# EAGLE board Aux Power Board V2 (EAGLE 9.2.2)
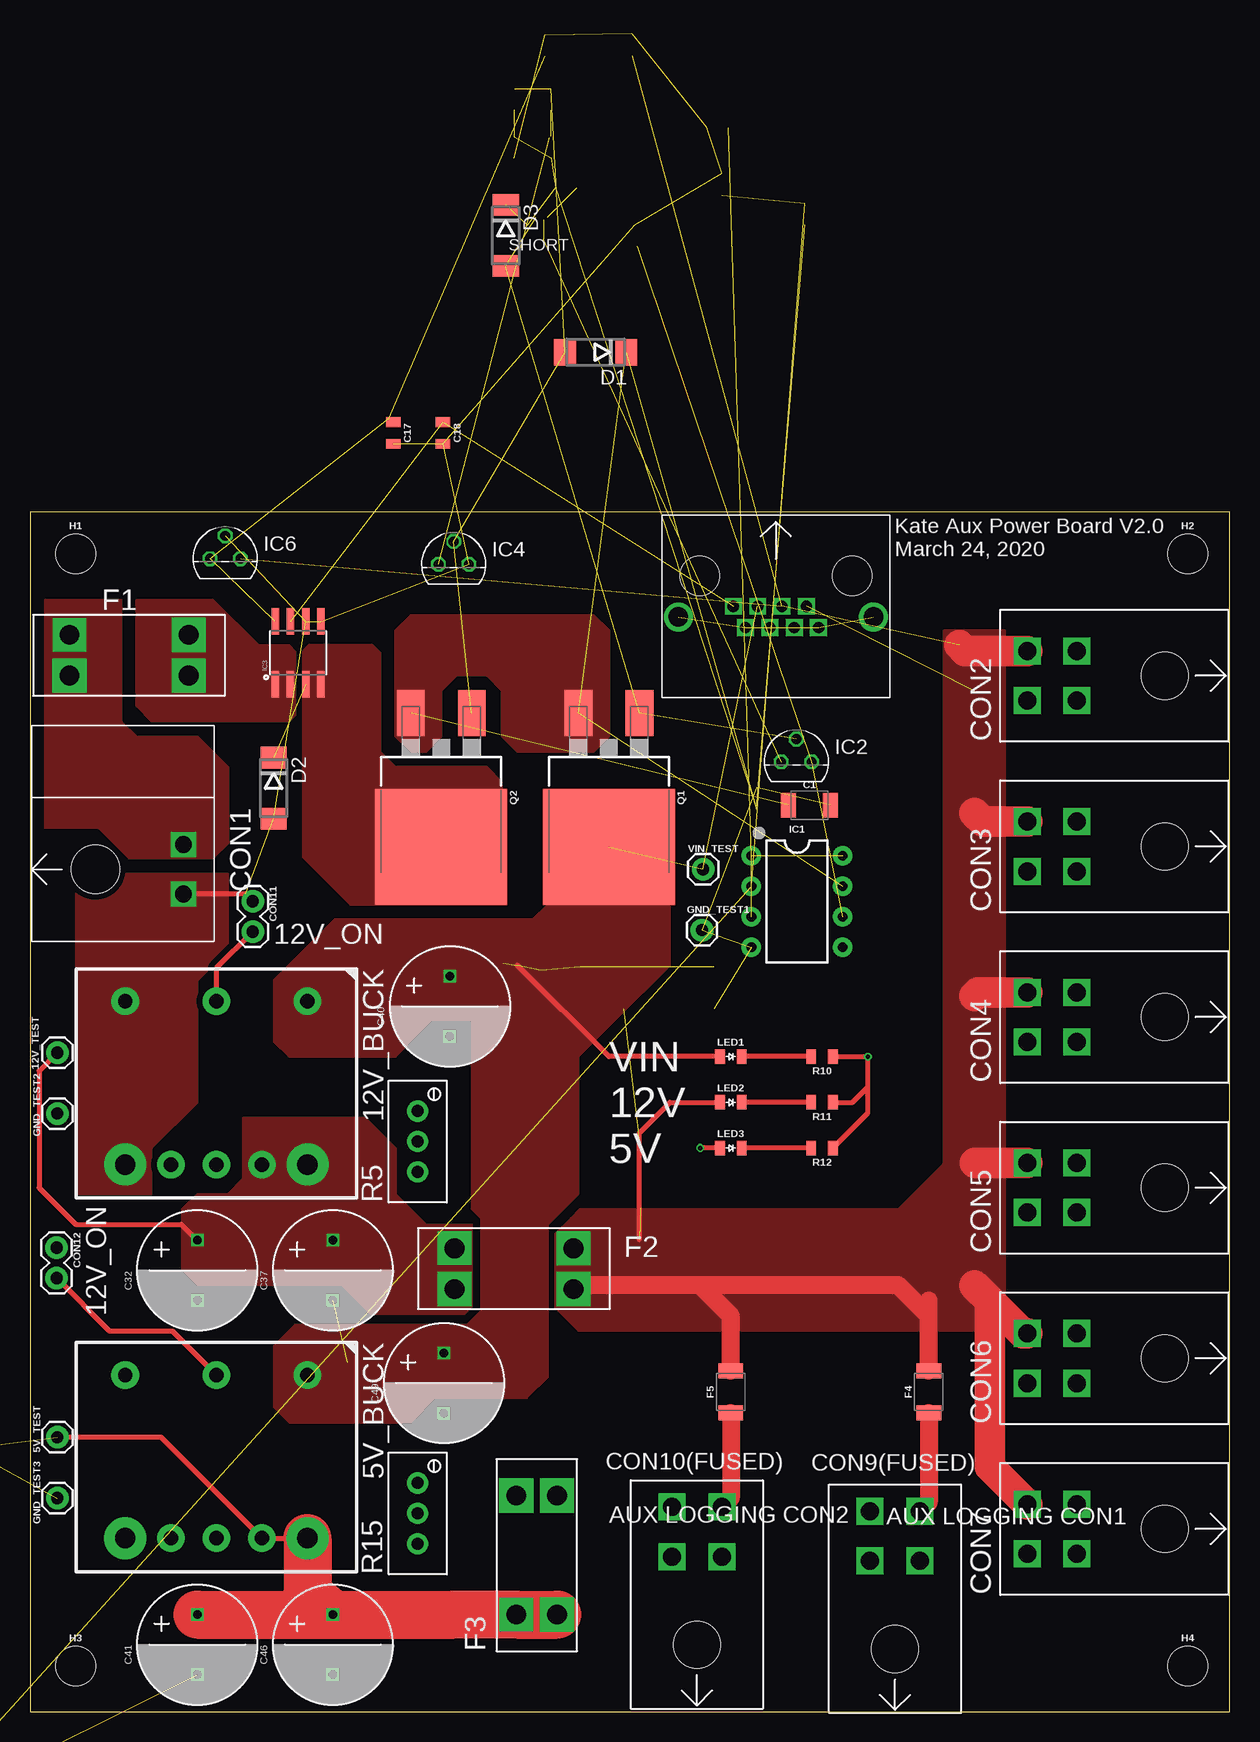
[diagram p0: board, top side]
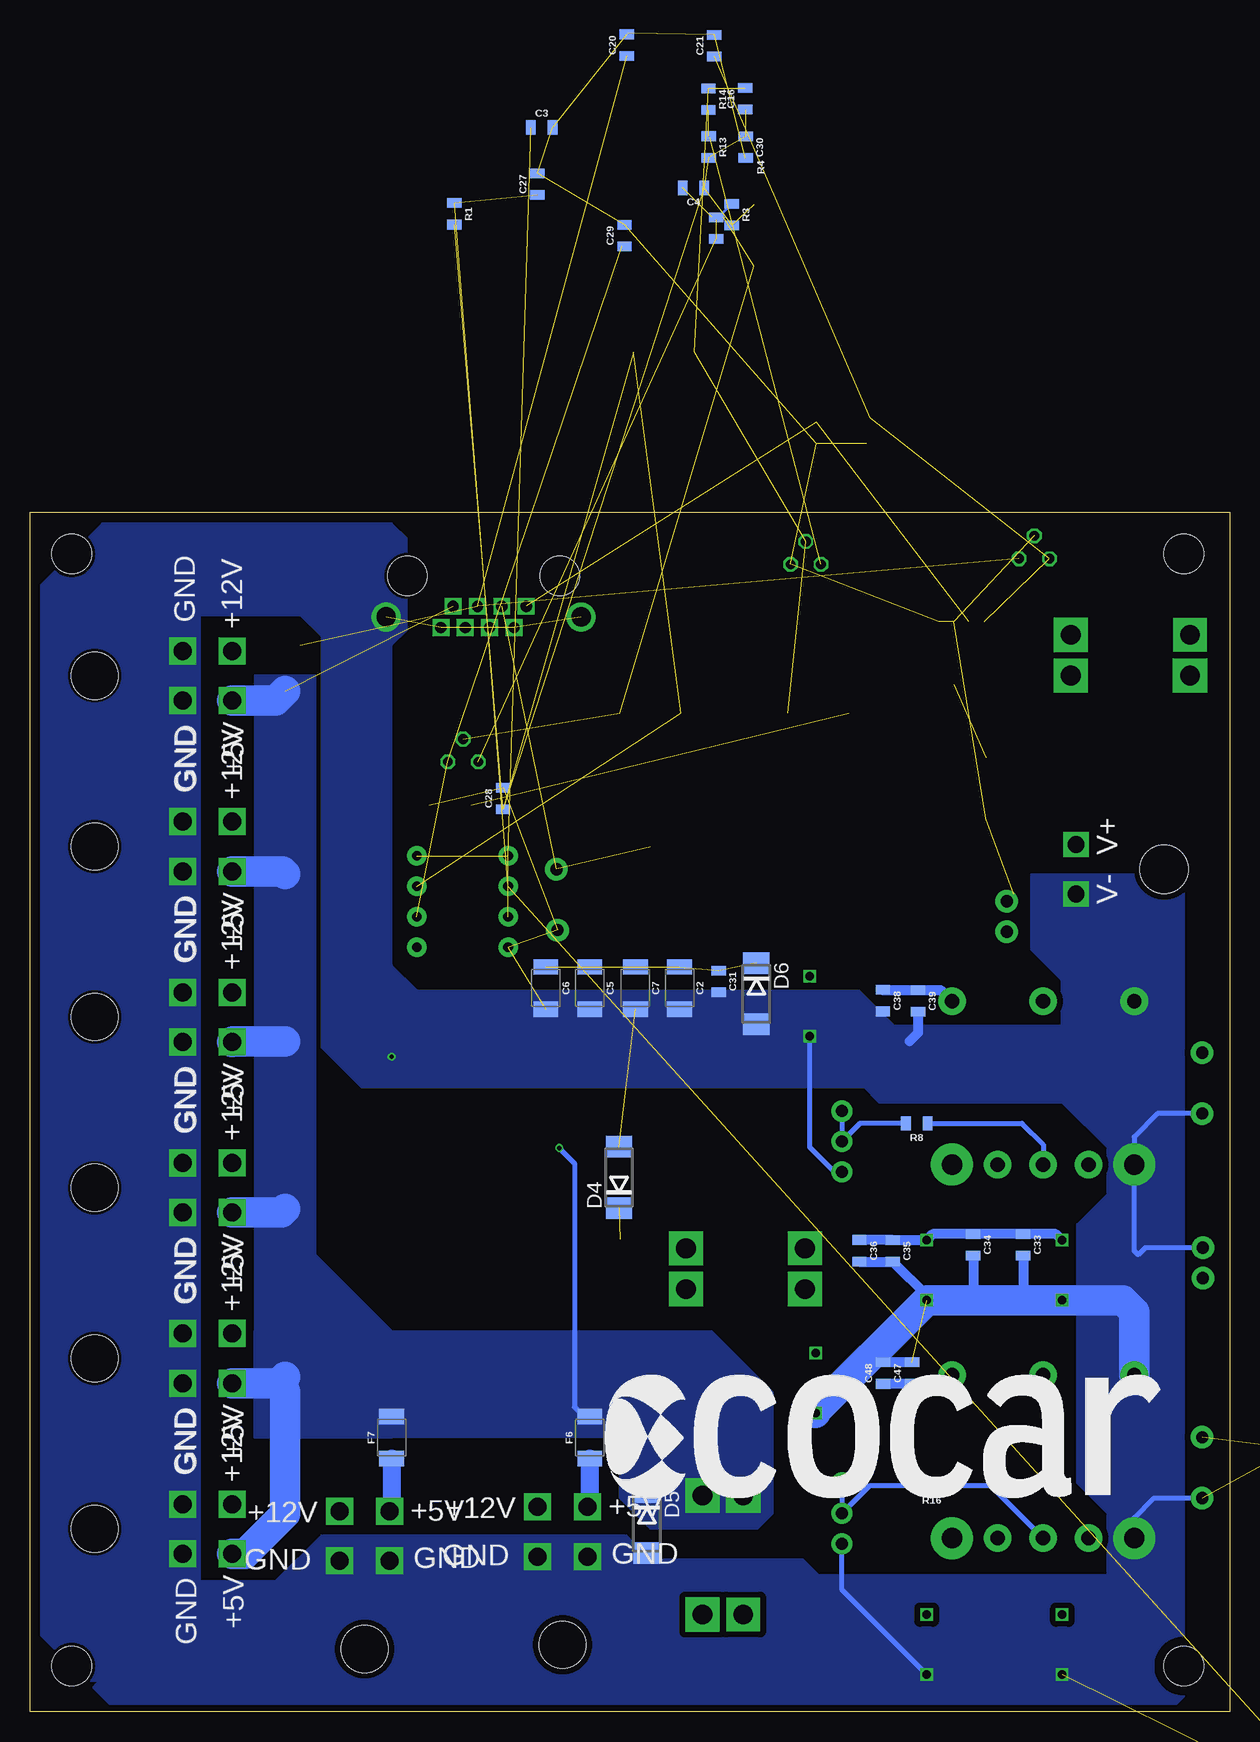
[diagram p1: board, bottom side, seen from below]

Size 100 x 100 mm. Coordinates in mm from the lower left corner, seen from the top.
Outline: 0,0 100,0 100,100 0,100 0,0
Copper layers (1*16): Top 0.035mm / dielectric 1.5mm / Bottom 0.035mm
Design rules "JLCPCB2Layer": minimum track width 6mil, minimum drill 10mil, track to track 6mil, track to pad 6mil, pad to pad 6mil, via to via 6mil, smd to smd 0mil, copper to edge 10mil, drill to drill 10mil, minimum pad ring 6mil, minimum via ring 6mil, stop-mask expansion 2mil, vias tented up to drill 100mil, thermal gap 10mil

## Footprints (pad centres in the part's own frame; a part is rotated, then mirrored left to right if it is on the bottom)
CONVERTER_I3A = drill 1.2 pad 2.3: 1 2.7,19.3; 2 2.7,11.7; 3 2.7,4.1; 5 16.3,7.9; 6 16.3,11.7; 7 16.3,15.5 | drill 1.7 pad 3.5: 4 16.3,4.1; 8 16.3,19.3
1X01 = drill 1.016 pad 1.88: 1 0,0
RJ45 = drill 0.94 square: 1 9.9,2.54; 2 8.88,4.32; 3 7.87,2.54; 4 6.85,4.32; 5 5.84,2.54; 6 4.82,4.32; 7 3.81,2.54; 8 2.79,4.32 | drill 1.62: 9 -1.78,3.43; 10 14.48,3.43 | hole 3.3: 0,0; 12.7,0
1210 = smd 1.27 x 2.06: 1 -1.755,0; 2 1.755,0
0805 = smd 0.8 x 1.2: 1 -0.9,0; 2 0.9,0
CAPACITOR_220UF_63V = drill 0.7 square: + 2.5,0; - -2.5,0
TE_2-PIN = drill 1.4 square: 1 -2.07,12.67; 2 2.07,12.67 | hole 4: 0,5.33
TE_4-PIN = drill 1.5 square: 1 2.07,11.48; 2 -2.07,11.48; 3 2.07,7.34; 4 -2.07,7.34 | hole 3.91: 0,0
1X02 = drill 1.016 pad 1.88: 1 0,0; 2 2.54,0
DO214AA = smd 1.8 x 2.2: A 2.55,0; C -2.55,0
FUSEHOLDER_VERTICAL = drill 1.65 pad 2.85 square: 1 3.045,1.665; 3 12.965,1.665; 4 12.965,5.065 | drill 1.65 pad 2.8 square: 2 3.045,5.065
STAND-OFF = hole 3.302: 0,0
DIP08 = drill 0.813 pad 1.626: 1 -3.81,-3.81; 2 -1.27,-3.81; 3 1.27,-3.81; 4 3.81,-3.81; 5 3.81,3.81; 6 1.27,3.81; 7 -1.27,3.81; 8 -3.81,3.81
TO92 = drill 0.813 octagon: 1 1.27,0; 2 0,1.905; 3 -1.27,0
SOIC8 = smd 0.61 x 2.21: 1 -1.905,-2.616; 2 -0.635,-2.616; 3 0.635,-2.616; 4 1.905,-2.616; 5 1.905,2.616; 6 0.635,2.616; 7 -0.635,2.616; 8 -1.905,2.616
0805_LED = smd 0.8 x 1.2: 1 -0.9,0; 2 0.9,0
TO-263/D2PAK = smd 2.32 x 3.81: 1 -2.54,-7.045; 3 2.54,-7.045 | smd 11 x 9.65: 2 0,4.125
TRIMPOT = drill 1 pad 1.778: 1 5.08,0; 2 2.54,0; 3 0,0

## Placement (x,y rotation side)
5V_BUCK  i3A  [CONVERTER_I3A]  3.84,30.78 270 top
5V_TEST  1X01  [1X01]  2.28,22.89 90 top
12V_BUCK  i3A  [CONVERTER_I3A]  3.84,61.92 270 top
12V_TEST  1X01  [1X01]  2.28,54.95 90 top
AUX_LOGGING  RJ45  [RJ45]  68.53,94.69 180 top
C1  10uF  [1210]  64.98,75.57 0 top
C2  10uF  [1210]  45.85,60.33 270 bottom
C3  1uF  [0805]  57.34,132.05 0 bottom  (outside the outline)
C4  1uF  [0805]  44.7,127.04 180 bottom  (outside the outline)
C5  10uF  [1210]  53.32,60.32 270 bottom
C6  10uF  [1210]  57.01,60.32 270 bottom
C7  10uF  [1210]  49.53,60.33 270 bottom
C16  1uF  [0805]  40.36,134.45 90 bottom  (outside the outline)
C17  0.1uF  [0805]  30.28,106.6 270 top  (outside the outline)
C18  1nF  [0805]  34.43,106.6 270 top  (outside the outline)
C20  0.1uF  [0805]  50.24,138.93 90 bottom  (outside the outline)
C21  1uF  [0805]  42.95,138.89 90 bottom  (outside the outline)
C27  0.1uF  [0805]  57.7,127.34 90 bottom  (outside the outline)
C28  0.1uF  [0805]  60.56,76.14 90 bottom
C29  0.1uF  [0805]  50.44,123.05 90 bottom  (outside the outline)
C30  0.1uF  [0805]  40.35,130.41 270 bottom  (outside the outline)
C31  0.1uF  [0805]  42.6,60.89 270 bottom
C32  220uF  [CAPACITOR_220UF_63V]  13.95,36.8 90 top
C33  0.1uF  [0805]  17.2,38.93 270 bottom
C34  10uF  [0805]  21.37,38.93 270 bottom
C35  10uF  [0805]  28.08,38.42 270 bottom
C36  10uF  [0805]  30.85,38.44 270 bottom
C37  220uF  [CAPACITOR_220UF_63V]  25.25,36.8 90 top
C38  1nF/50V  [0805]  28.89,59.28 270 bottom
C39  1uF/50V  [0805]  25.96,59.25 270 bottom
C40  220uF  [CAPACITOR_220UF_63V]  35.01,58.8 90 top
C41  220uF  [CAPACITOR_220UF_63V]  13.95,5.6 90 top
C42  0.1uF  [0805]  -11.32,28.12 0 top  (outside the outline)
C43  10uF  [0805]  -12.03,21.77 0 top  (outside the outline)
C44  10uF  [0805]  -8.93,21.77 0 top  (outside the outline)
C45  10uF  [0805]  -5.83,21.77 0 top  (outside the outline)
C46  220uF  [CAPACITOR_220UF_63V]  25.25,5.6 90 top
C47  1nF/50V  [0805]  26.47,28.23 90 bottom
C48  1uF/50V  [0805]  28.88,28.23 90 bottom
C49  220uF  [CAPACITOR_220UF_63V]  34.51,27.4 90 top
CON1  TE_2-PIN  [TE_2-PIN]  0.13,70.23 270 top
CON2  TE_4-PIN  [TE_4-PIN]  94.61,86.36 90 top
CON3  TE_4-PIN  [TE_4-PIN]  94.61,72.14 90 top
CON4  TE_4-PIN  [TE_4-PIN]  94.61,57.91 90 top
CON5  TE_4-PIN  [TE_4-PIN]  94.61,43.69 90 top
CON6  TE_4-PIN  [TE_4-PIN]  94.61,29.46 90 top
CON7  TE_4-PIN  [TE_4-PIN]  94.61,15.24 90 top
CON9(FUSED)  TE_4-PIN  [TE_4-PIN]  72.11,5.23 0 top
CON10(FUSED)  TE_4-PIN  [TE_4-PIN]  55.6,5.59 0 top
CON11  1X02  [1X02]  18.57,67.56 270 top
CON12  1X02  [1X02]  2.22,38.69 270 top
D1  SMBJ12CA  [DO214AA]  47.15,113.33 180 top  (outside the outline)
D2  SMBJ22CA  [DO214AA]  20.32,77 270 top
D3  SMBJ12CA  [DO214AA]  39.66,123.06 270 top  (outside the outline)
D4  SMBJ12CA  [DO214AA]  50.89,44.54 90 bottom
D5  SMBJ5.0CA  [DO214AA]  48.57,15.78 270 bottom
D6  SMBJ22CA  [DO214AA]  39.45,59.85 270 bottom
F1  7.5A  [FUSEHOLDER_VERTICAL]  0.25,84.71 0 top
F2  7.5A  [FUSEHOLDER_VERTICAL]  32.35,33.57 0 top
F3  7.5A  [FUSEHOLDER_VERTICAL]  45.61,5.06 90 top
F4  [1210]  74.93,26.67 90 top
F5  [1210]  58.42,26.67 90 top
F6  [1210]  53.34,22.86 90 bottom
F7  [1210]  69.85,22.86 90 bottom
GND_TEST1  1X01  [1X01]  56.02,65.16 0 top
GND_TEST2  1X01  [1X01]  2.28,49.87 90 top
GND_TEST3  1X01  [1X01]  2.28,17.81 90 top
H1  STAND-OFF  [STAND-OFF]  3.81,96.52 0 top
H2  STAND-OFF  [STAND-OFF]  96.52,96.52 0 top
H3  STAND-OFF  [STAND-OFF]  3.81,3.81 0 top
H4  STAND-OFF  [STAND-OFF]  96.52,3.81 0 top
IC1  OP-AMP_LM10  [DIP08]  63.95,67.54 270 top
IC2  LINEAR-REGULATOR_LM337L  [TO92]  63.9,79.19 0 top
IC3  CURRENT-SENSOR_ACS723  [SOIC8]  22.35,88.27 0 top
IC4  LINEAR-REGULATOR_LM337L  [TO92]  35.32,95.65 0 top
IC6  LINEAR-REGULATOR_LP2950  [TO92]  16.27,96.12 0 top
LED1  RED  [0805_LED]  58.42,54.61 0 top
LED2  RED  [0805_LED]  58.42,50.8 0 top
LED3  RED  [0805_LED]  58.42,46.99 0 top
Q1  [TO-263/D2PAK]  48.26,76.2 180 top
Q2  [TO-263/D2PAK]  34.29,76.2 180 top
R1  100k  [0805]  64.62,124.86 270 bottom  (outside the outline)
R2  10k  [TRIMPOT]  -10.16,-6.35 0 top  (outside the outline)
R3  2.4k  [0805]  41.49,124.8 270 bottom  (outside the outline)
R4  330  [0805]  42.8,123.67 270 bottom  (outside the outline)
R5  10k  [TRIMPOT]  32.31,45 90 top
R8  1.6k  [0805]  26.08,49.05 180 bottom
R10  3.9k  [0805]  66.04,54.61 180 top
R11  2k  [0805]  66.04,50.8 180 top
R12  560  [0805]  66.04,46.99 180 top
R13  2.4k  [0805]  43.43,130.44 270 bottom  (outside the outline)
R14  330  [0805]  43.44,134.41 270 bottom  (outside the outline)
R15  10k  [TRIMPOT]  32.31,14 90 top
R16  8.2k  [0805]  24.82,18.82 180 bottom
U$7  ECOCAR_LOGO  [ECOCAR_LOGO_2018]  52.07,17.78 0 bottom
VIN_TEST  1X01  [1X01]  56.11,70.24 0 top

## Library data of the parts
5V_BUCK 12V_BUCK = EcoCar-Modules
5V_TEST 12V_TEST CON11 CON12 GND_TEST1-GND_TEST3 VIN_TEST = EcoCar-Connectors-2.54mm
AUX_LOGGING CON1-CON7 CON9(FUSED) CON10(FUSED) = EcoCar-Connectors
C1-C7 C16-C18 C20 C21 C27-C49 R1-R5 R8 R10-R16 = EcoCar-Passives
D1-D6 F1-F7 = EcoCar-Fuses-Protection
H1-H4 U$7 = EcoCar-Miscellaneous
IC1-IC4 IC6 = EcoCar-Integrated-Circuits
LED1-LED3 Q1 Q2 = EcoCar-Discrete-Semiconductors

## Nets
5V: AUX_LOGGING.7 CON2.2 CON3.2 CON4.2 CON5.2 CON6.2 CON7.2 D5.C F3.3 F3.4 F6.2 F7.2 LED3.1
5V_LINEAR: C17.1 C21.1 IC3.8 IC6.3
12V: AUX_LOGGING.5 C20.1 CON2.1 CON3.1 CON4.1 CON5.1 CON6.1 CON7.1 D4.C F2.3 F2.4 F4.2 F5.2 IC6.1 LED2.1
BATTERY_IN: CON1.1 F1.1 F1.2
CURRENT_SENSOR_IN: F1.3 F1.4 IC3.1 IC3.2
CURRENT_SENSOR_OUT: D2.C IC3.3 IC3.4 Q2.2
GND: 5V_BUCK.3 5V_BUCK.4 12V_BUCK.3 12V_BUCK.4 AUX_LOGGING.2 AUX_LOGGING.4 AUX_LOGGING.6 AUX_LOGGING.8 AUX_LOGGING.9 AUX_LOGGING.10 C1.2 C2.2 C3.2 C5.2 C6.2 C7.2 C17.2 C18.2 C20.2 C21.2 C27.2 C28.2 C29.2 C30.2 C31.2 C32.- C33.2 C34.2 C35.2 C36.2 C37.- C38.2 C39.2 C40.- C41.- C42.2 C43.2 C44.2 C45.2 C46.- C47.2 C48.2 C49.- CON1.2 CON2.3 CON2.4 CON3.3 CON3.4 CON4.3 CON4.4 CON5.3 CON5.4 CON6.3 CON6.4 CON7.3 CON7.4 CON9(FUSED).3 CON9(FUSED).4 CON10(FUSED).3 CON10(FUSED).4 CON11.1 CON12.1 D2.A D4.A D5.A D6.A GND_TEST1.1 GND_TEST2.1 GND_TEST3.1 IC1.4 IC3.5 IC3.6 IC4.1 IC6.2 R2.1 R5.3 R10.1 R11.1 R12.1 R15.3
HALL_CURRENT: AUX_LOGGING.1 C18.1 IC3.7
N$1: CON9(FUSED).2 F7.1
N$2: CON9(FUSED).1 F4.1
N$3: 12V_BUCK.6 R8.1
N$4: LED1.2 R10.2
N$5: C3.1 IC1.1 IC1.3 IC1.8
N$6: C27.1 IC1.2 R1.1 R2.2 R2.3
N$7: R5.1 R5.2 R8.2
N$8: C4.2 D3.A IC2.2 Q1.1 R4.1
N$9: IC2.3 R3.1 R4.2
N$10: CON10(FUSED).1 F5.1
N$11: 5V_BUCK.6 R16.1
N$12: CON10(FUSED).2 F6.1
N$13: LED3.2 R12.2
N$17: LED2.2 R11.2
N$18: IC4.3 R13.1 R14.2
N$21: C16.2 D1.A IC4.2 Q2.1 R14.1
N$25: 12V_BUCK.7 12V_BUCK.8 12V_TEST.1 C32.+ C33.1 C34.1 C35.1 C36.1 C37.+ F2.1 F2.2
N$26: R15.1 R15.2 R16.2
N$29: 5V_BUCK.7 5V_BUCK.8 5V_TEST.1 C41.+ C42.1 C43.1 C44.1 C45.1 C46.+ F3.1 F3.2
N$30: 12V_BUCK.2 CON11.2
N$33: 5V_BUCK.2 CON12.2
REGULATOR_ON: C29.1 IC1.6 IC2.1
REVERSE_PROT_OUT: C1.1 C4.1 C16.1 C28.1 C30.1 D1.C D3.C IC1.7 Q1.3 Q2.3 R1.2 R3.2 R13.2
VIN: 5V_BUCK.1 12V_BUCK.1 AUX_LOGGING.3 C2.1 C5.1 C6.1 C7.1 C31.1 C38.1 C39.1 C40.+ C47.1 C48.1 C49.+ D6.C LED1.1 Q1.2 VIN_TEST.1

## Tracks (layer width: path | path; a pad name or v marks a point on that pad's centre or on a via)
5V  (via drill 0.35)  (1 unrouted)
  Top 0.406: LED3.1 v55.88,46.99
  Bottom 0.406: v55.88,46.99 54.61,45.72 54.61,25.4 53.83,24.61 F6.2
  Bottom 2.54: CON7.2 82.08,13.17 78.74,16.51 78.74,26.67 | CON6.2 79.29,27.39 78.74,27.94 | CON5.2 79.03,41.62 78.74,41.91 | CON4.2 83.1,55.88 78.74,55.88 | CON3.2 78.96,70.07 78.74,69.85 | CON2.2 79.54,84.29 78.74,85.09
  pour Bottom (isolate 0.5, no thermals): 39.37,15.24 48.26,15.24 50.8,17.78 50.8,20.32 50.8,21.59 52.07,22.86 81.28,22.86 81.28,31.75 43.18,31.75 38.1,26.67 38.1,20.32 38.1,16.51
  pour Bottom (isolate 0.5, no thermals): 76.2,86.36 81.28,86.36 81.28,22.86 69.85,22.86 69.85,31.75 76.2,38.1
5V_LINEAR  (3 unrouted)
  Top 0.254: C17.1 29.96,107.82
12V  (4 unrouted)
  Top 0.406: LED2.1 53.34,50.8 50.8,48.26 50.8,39.37
  Top 1.5: F5.2 58.42,33.02 55.88,35.56 | 55.88,35.56 45.64,35.56 F2.3 | 74.93,33.02 72.39,35.56 55.88,35.56 | F4.2 74.93,34.29
  Top 2: 78.78,45.76 78.74,45.72
  Top 2.54: CON4.1 79.03,59.98 78.74,59.69 | CON3.1 79.46,74.21 78.74,74.93 | CON2.1 77.94,88.43 77.47,88.9 | CON5.1 78.78,45.76 | CON6.1 82.77,31.53 80.01,34.29 | 78.74,35.56 80.01,34.29 | CON7.1 80.01,20.43 80.01,34.29
  pour Top (isolate 0.5, no thermals): 43.81,33.78 43.81,39.88 45.09,41.15 45.85,41.91 50.8,41.91 72.39,41.91 76.2,45.72 76.2,90.17 81.28,90.17 81.28,34.29 78.74,31.75 45.72,31.75 43.81,33.66
BATTERY_IN
  pour Top (isolate 0.5, no thermals): 13.97,71.12 8.89,71.12 8.26,71.12 5.71,73.66 1.27,73.66 1.27,92.71 7.62,92.71 7.62,82.55 8.89,81.28 13.97,81.28 16.51,78.74 16.51,72.39 15.24,71.12
CURRENT_SENSOR_IN
  pour Top (isolate 0.5, no thermals): 8.89,92.71 15.24,92.71 19.05,88.9 20.32,88.9 21.59,88.9 22.1,88.39 22.1,84.58 22.1,83.06 21.59,82.55 10.16,82.55 8.89,83.82
CURRENT_SENSOR_OUT  (1 unrouted)
  pour Top (isolate 0.5, no thermals): 28.57,88.9 23.24,88.9 22.73,88.39 22.73,71.25 26.67,67.31 39.37,67.31 39.37,77.47 38.1,78.74 30.48,78.74 29.21,80.01 29.21,88.27
GND  (via drill 0.35)  (29 unrouted)
  Top 0.406: CON11.1 17.97,68.16 CON1.2 | R12.1 69.85,49.9 69.85,52.07 | 69.85,52.07 v69.85,54.61 R10.1 | R11.1 68.58,50.8 69.85,52.07
  Bottom 0.254: C20.2 50.13,139.94
  Bottom 0.406: CON12.1 7.03,38.69 7.62,38.1 7.94,38.42 12V_BUCK.4 7.94,47.94 6.01,49.87 GND_TEST2.1 | GND_TEST3.1 2.31,17.78 6.35,17.78 7.94,16.19 5V_BUCK.4 | C40.- 35.01,47.08 33.02,45.09 32.4,45.09 R5.3 | C46.- 32.31,10.16 R15.3 | 26.67,55.88 26.36,56.19
  Bottom 0.813: C47.2 C48.2 | C39.2 25.96,56.59 26.67,55.88 | C33.2 17.2,34.99 16.51,34.3 | C34.2 21.37,34.52 21.59,34.3 | C36.2 30.84,37.52 C35.2 25.25,34.69 C37.-
  Bottom 2.54: 5V_BUCK.3 7.94,33.34 8.9,34.3 C32.- 16.51,34.3 21.59,34.3 C37.- 34.51,25.04 C49.-
  pour Bottom (no thermals): 85.85,95.25 85.85,2.54 95.25,2.54 99.06,6.35 99.06,93.98 95.25,97.79 85.85,97.79
  pour Bottom (no thermals): 3.81,60.96 10.16,60.96 13.97,57.15 27.94,57.15 30.86,60.07 67.69,60.07 69.85,62.23 69.85,88.9 68.58,90.17 68.58,97.79 69.85,99.06 93.98,99.06 99.06,93.98 99.06,91.44 77.47,91.44 75.69,89.66 75.69,55.37 72.39,52.07 30.48,52.07 29.21,50.8 13.97,50.8 10.03,46.86 10.03,43.18 3.81,43.18
  pour Bottom (isolate 0.5, no thermals): 13.97,69.85 5.08,69.85 3.81,68.58 3.81,10.16 10.16,10.16 10.16,16.51 12.7,19.05 12.7,40.64 10.16,43.18 10.16,46.99 13.97,50.8 13.97,60.96 16.51,63.5 16.51,69.85
  pour Top (isolate 0.5, no thermals): 16.51,69.85 5.08,69.85 3.81,68.58 3.81,43.18 10.16,43.18 10.16,46.99 13.97,50.8 13.97,60.96 16.51,63.5
  pour Bottom (isolate 0.5, no thermals): 10.16,10.16 3.81,10.16 3.81,1.27 4.45,0.64 7.62,0.64 93.34,0.64 99.06,6.35 99.06,11.43 86.36,11.43 85.85,10.92 83.69,10.92 79.5,10.92 75.69,14.73 50.29,14.73 48.26,12.7 36.83,12.7 35.56,12.7 34.29,11.43 10.16,11.43
HALL_CURRENT  (2 unrouted)
N$1
  Bottom 1.5: F7.1 69.85,16.9 CON9(FUSED).2
N$2
  Top 1.5: F4.1 74.93,17.46 CON9(FUSED).1
N$3
  Bottom 0.406: R8.1 17.3,49.05 15.54,47.29 12V_BUCK.6
N$4
  Top 0.406: R10.2 LED1.2
N$5  (3 unrouted)
N$6  (4 unrouted)
N$7
  Bottom 0.406: R8.2 30.8,49.05 R5.2 R5.1
N$8  (4 unrouted)
  Bottom 0.254: 43.13,124.57 R4.1 42.17,124.57
N$9  (2 unrouted)
  Bottom 0.254: 42.8,124.39 R3.1
N$10
  Top 1.5: F5.1 58.42,17.82 CON10(FUSED).1
N$11
  Bottom 0.406: 5V_BUCK.6 19.88,18.82 R16.1
N$12
  Bottom 1.5: F6.1 53.34,17.26 CON10(FUSED).2
N$13
  Top 0.406: R12.2 LED3.2
N$17
  Top 0.406: R11.2 LED2.2
N$18  (2 unrouted)
  Bottom 0.254: R13.1 43.3,131.21
N$21  (4 unrouted)
  Bottom 0.254: 40.4,135.31 C16.2
N$25
  Top 0.406: 12V_TEST.1 0.76,53.43 0.76,43.69 3.81,40.64 12.61,40.64 C32.+
  Bottom 0.813: C36.1 30.84,39.32 C35.1 28.06,39.3 C37.+ 24.72,39.83 C34.1 C33.1 14.48,39.83 C32.+
  pour Top (isolate 0.5, no thermals): 17.78,49.53 27.94,49.53 30.48,46.99 30.48,45.72 30.48,43.18 33.02,40.64 36.83,40.64 36.83,33.78 36.2,33.15 32.38,33.15 28.45,33.15 26.04,35.56 13.97,35.56 12.7,36.83 12.7,40.64 12.7,41.91 13.97,43.18 16.51,43.18 17.78,44.45
N$26
  Bottom 0.406: R16.2 30.03,18.82 R15.2 R15.1
N$29  (4 unrouted)
  Top 0.406: 5V_BUCK.8 5V_BUCK.7 10.93,22.89 5V_TEST.1
  Top 4: 5V_BUCK.8 23.14,9.86 C46.+ | C41.+ C46.+ | C46.+ 35.34,8.1 35.35,8.11 F3.2 F3.1
N$30
  Top 0.406: CON11.2 15.54,61.99 12V_BUCK.2
N$33
  Top 0.406: CON12.2 6.62,31.75 11.87,31.75 5V_BUCK.2
REGULATOR_ON  (2 unrouted)
  Bottom 0.254: C29.1 50.65,122.15
REVERSE_PROT_OUT  (11 unrouted)
  Bottom 0.254: C30.1
  pour Top (isolate 0.5, no thermals): 30.48,81.28 30.48,88.9 30.48,90.17 31.75,91.44 46.99,91.44 48.26,90.17 48.26,81.28 46.99,80.01 44.45,80.01 40.64,80.01 39.37,81.28 39.37,85.09 38.1,86.36 35.56,86.36 34.29,85.09 34.29,81.28 33.02,80.01 31.75,80.01
VIN  (8 unrouted)
  Top 0.406: 40.64,62.23 48.26,54.61 LED1.1
  Bottom 0.813: 5V_BUCK.1 23.89,27.33 C47.1 C48.1 | C38.1 28.86,60.15 C39.1 24.07,60.15 12V_BUCK.1
  pour Top (no thermals): 43.18,76.2 43.18,67.31 41.91,66.04 25.4,66.04 20.32,60.96 20.32,55.88 21.59,54.61 30.48,54.61 33.53,57.66 48.77,57.66 53.34,62.23 53.34,76.2
  pour Top (no thermals): 36.83,58.42 36.83,41.91 37.59,41.15 37.59,33.4 36.45,32.26 22.1,32.26 20.32,30.48 20.32,25.4 21.59,24.13 31.75,24.13 33.78,26.16 41.4,26.16 43.18,27.94 43.18,40.64 45.72,43.18 45.72,54.61 49.53,58.42

## Text on the board
tPlace: SHORT | Kate Aux Power Board V2.0 / March 24, 2020 | 12V_ON | VIN | 12V | 5V | 12V_ON
tNames: AUX LOGGING CON2 | AUX LOGGING CON1